# EAGLE board CT_schematic (EAGLE 7.6.0)

Size 100 x 80 mm. Coordinates in mm from the lower left corner, seen from the top.
Outline: 0,0 100,0 100,80 0,80 0,0
Copper layers (1*16): Top 0.035mm / dielectric 1.5mm / Bottom 0.035mm
Design rules "default": minimum track width 10mil, minimum drill 24mil, track to track 8mil, track to pad 8mil, pad to pad 8mil, via to via 8mil, smd to smd 8mil, copper to edge 40mil, drill to drill 8mil, minimum pad ring 10mil, minimum via ring 8mil, stop-mask expansion 4mil, vias tented up to drill 0mil, thermal gap 10mil

## Footprints (pad centres in the part's own frame; a part is rotated, then mirrored left to right if it is on the bottom)
C0603 = smd 0.8 x 0.8: 1 -0.762,0; 2 0.762,0
C0402 = smd 0.5 x 0.5: 1 -0.508,0; 2 0.508,0
C1206 = smd 1.3 x 1.6: 1 -1.524,0; 2 1.524,0
C1210 = smd 1.2 x 2.5: 1 -1.524,0; 2 1.524,0
EXV-9H = smd 3.505 x 1.676: 1 -2.857,0; 2 2.857,0
L0603 = smd 0.8 x 0.8: 1 -0.762,0; 2 0.762,0
PJ-037B_PACKAGE = drill 3.7 square: 1 12,0 | drill 3.2 square: 2 6,0
R0603 = smd 0.8 x 0.8: 1 -0.762,0; 2 0.762,0
LQFP64 = smd 0.3 x 1.2: 1 -3.75,-5.75; 2 -3.25,-5.75; 3 -2.75,-5.75; 4 -2.25,-5.75; 5 -1.75,-5.75; 6 -1.25,-5.75; 7 -0.75,-5.75; 8 -0.25,-5.75; 9 0.25,-5.75; 10 0.75,-5.75; 11 1.25,-5.75; 12 1.75,-5.75; 13 2.25,-5.75; 14 2.75,-5.75; 15 3.25,-5.75; 16 3.75,-5.75; 33 3.75,5.75; 34 3.25,5.75; 35 2.75,5.75; 36 2.25,5.75; 37 1.75,5.75; 38 1.25,5.75; 39 0.75,5.75; 40 0.25,5.75; 41 -0.25,5.75; 42 -0.75,5.75; 43 -1.25,5.75; 44 -1.75,5.75; 45 -2.25,5.75; 46 -2.75,5.75; 47 -3.25,5.75; 48 -3.75,5.75 | smd 1.2 x 0.3: 17 5.75,-3.75; 18 5.75,-3.25; 19 5.75,-2.75; 20 5.75,-2.25; 21 5.75,-1.75; 22 5.75,-1.25; 23 5.75,-0.75; 24 5.75,-0.25; 25 5.75,0.25; 26 5.75,0.75; 27 5.75,1.25; 28 5.75,1.75; 29 5.75,2.25; 30 5.75,2.75; 31 5.75,3.25; 32 5.75,3.75; 49 -5.75,3.75; 50 -5.75,3.25; 51 -5.75,2.75; 52 -5.75,2.25; 53 -5.75,1.75; 54 -5.75,1.25; 55 -5.75,0.75; 56 -5.75,0.25; 57 -5.75,-0.25; 58 -5.75,-0.75; 59 -5.75,-1.25; 60 -5.75,-1.75; 61 -5.75,-2.25; 62 -5.75,-2.75; 63 -5.75,-3.25; 64 -5.75,-3.75
TDFN-8/6MM = smd 0.3 x 0.75: 1 0,0; 2 0.5,0; 3 1,0; 4 1.5,0; 5 1.5,3; 6 1,3; 7 0.5,3; 8 0,3
DFN8-S = smd 0.6 x 0.4: 1 -2.69,1.905; 2 -2.69,0.635; 3 -2.69,-0.635; 4 -2.69,-1.905; 5 2.69,-1.905; 6 2.69,-0.635; 7 2.69,0.635; 8 2.69,1.905
ABLS-25.000MHZ-B2F-T = smd 5.6 x 2.8: 1 -3.81,0; 2 5.69,0
ASEK = smd 1.4 x 1: 1 -1.1,-0.8; 2 1.1,-0.8; 3 1.1,0.8; 4 -1.1,0.8
WSON-8 = smd 0.3 x 0.6: 1 -0.75,0; 2 0.05,0; 3 0.85,0; 4 1.65,0; 5 1.65,3.8; 6 0.85,3.8; 7 0.05,3.8; 8 -0.75,3.8 | smd 3 x 2.6: PAD 0.45,1.9
SON-6 = smd 0.55 x 0.3: 1 -0.355,0.5 | smd 0.52 x 0.3: 2 -0.37,0; 3 -0.37,-0.5; 4 0.37,-0.5; 5 0.37,0; 6 0.37,0.5
SW_4-1437565-2 = smd 1.4 x 2.1: 1 -2.23,4.55; 2 -2.23,-4.55; 3 2.23,4.55; 4 2.23,-4.55
LGM67K-G1J2-24-Z = smd 0.8 x 1.4: A -2,0; C 0,0
NC7SZ125M5X = smd 1.3 x 0.7: 1 -1.3,0.95; 2 -1.3,0; 3 -1.3,-0.95; 4 1.3,-0.95; 5 1.3,0.95

## Placement (x,y rotation side)
C1  1e-07  [C0603]  -48.26,53.34 0 top  (outside the outline)
C2  1e-07  [C0603]  -52.07,53.34 0 top  (outside the outline)
C3  4.7e-06  [C0603]  -44.45,53.34 0 top  (outside the outline)
C4  1e-07  [C0603]  -55.88,53.34 0 top  (outside the outline)
C5  1e-07  [C0603]  -59.69,53.34 0 top  (outside the outline)
C6  1e-08  [C0603]  -15.24,58.42 0 top  (outside the outline)
C7  1e-06  [C0603]  -19.05,58.42 0 top  (outside the outline)
C8  1e-11  [C0402]  -60.96,58.42 0 top  (outside the outline)
C9  1e-11  [C0402]  -15.24,63.5 0 top  (outside the outline)
C10  1e-08  [C0402]  -19.05,63.5 0 top  (outside the outline)
C11  1e-08  [C0402]  -22.86,63.5 0 top  (outside the outline)
C12  1e-08  [C0402]  -26.67,63.5 0 top  (outside the outline)
C13  1e-08  [C0402]  -30.48,63.5 0 top  (outside the outline)
C14  1e-05  [C1206]  -35.56,45.72 0 top  (outside the outline)
C15  1e-05  [C1210]  -29.21,46.99 0 top  (outside the outline)
C16  1e-07  [C0402]  -34.29,63.5 0 top  (outside the outline)
C17  0.0001  [EXV-9H]  -17.78,39.37 0 top  (outside the outline)
C18  0.0001  [EXV-9H]  -29.21,39.37 0 top  (outside the outline)
C19  1e-08  [C0402]  -38.1,63.5 0 top  (outside the outline)
F1  240.0  [L0603]  -22.86,58.42 0 top  (outside the outline)
J1  PJ-037B  [PJ-037B_PACKAGE]  -27.94,7.62 0 top  (outside the outline)
R2  1000.0  [R0603]  -26.67,58.42 0 top  (outside the outline)
R4  4700.0  [R0603]  -30.48,58.42 0 top  (outside the outline)
R5  2200.0  [R0603]  -34.29,58.42 0 top  (outside the outline)
R6  2200.0  [R0603]  -38.1,58.42 0 top  (outside the outline)
R7  2200.0  [R0603]  -41.91,58.42 0 top  (outside the outline)
R8  2200.0  [R0603]  -45.72,58.42 0 top  (outside the outline)
R9  10000.0  [R0603]  -15.24,53.34 0 top  (outside the outline)
R10  10000.0  [R0603]  -20.32,53.34 0 top  (outside the outline)
R11  10000.0  [R0603]  -25.4,53.34 0 top  (outside the outline)
R12  10000.0  [R0603]  -30.48,53.34 0 top  (outside the outline)
R13  100000.0  [R0603]  -46.99,45.72 0 top  (outside the outline)
R14  2231.0  [R0603]  -49.53,58.42 0 top  (outside the outline)
R15  1000.0  [R0603]  -53.34,58.42 0 top  (outside the outline)
R16  10000.0  [R0603]  -35.56,53.34 0 top  (outside the outline)
R17  10000.0  [R0603]  -40.64,53.34 0 top  (outside the outline)
R18  9100.0  [R0603]  -57.15,58.42 0 top  (outside the outline)
R19  680000.0  [R0603]  -52.07,45.72 0 top  (outside the outline)
R20  120000.0  [R0603]  -57.15,45.72 0 top  (outside the outline)
U1  STM32F030RCT6  [LQFP64]  -40.64,7.62 0 top  (outside the outline)
U2  24AA04-I/MC  [TDFN-8/6MM]  -54.61,19.05 0 top  (outside the outline)
U3  24AA512-I/MF  [DFN8-S]  -41.91,20.32 0 top  (outside the outline)
U4  ABLS-25.000MHZ-B2F-T  [ABLS-25.000MHZ-B2F-T]  -48.26,39.37 0 top  (outside the outline)
U5  ASEK-32.768KHz-ECST  [ASEK]  -49.53,30.48 0 top  (outside the outline)
U6  LP3878SDX-ADJ/NOPB  [WSON-8]  -30.48,29.21 0 top  (outside the outline)
U7  TPS3895ADRYR  [SON-6]  -40.64,62.23 0 top  (outside the outline)
U8  4-1437565-2  [SW_4-1437565-2]  -27.94,20.32 0 top  (outside the outline)
U9  Q65110A2395  [LGM67K-G1J2-24-Z]  -17.78,46.99 0 top  (outside the outline)
U10  nc7sz125m5x  [NC7SZ125M5X]  -40.64,45.72 0 top  (outside the outline)

## Library data of the parts
C1-C19 F1 J1 R2 R4-R20 U1-U10 = circuit_tree

## Nets
CLK_CRYSTAL_U1_5: C8.1 U1.5 U4.1
CLK_CRYSTAL_U1_6: C9.1 U1.6 U4.2
CLK_U1_3: U1.3 U5.3
GND: C1.2 C2.2 C3.2 C4.2 C5.2 C6.2 C7.2 C8.2 C9.2 C10.2 C11.2 C12.2 C13.2 C14.2 C15.2 C16.2 C17.2 C18.2 C19.2 J1.2 R2.2 R9.2 R12.2 R15.2 R18.2 R20.2 U1.12 U1.18 U1.31 U1.47 U1.63 U2.4 U3.4 U5.2 U6.3 U6.PAD U7.2 U9.C U10.1 U10.3
NET_U1_7: R4.1 U1.7 U10.4
NET_U1_13: C6.1 C7.1 F1.1 U1.13
NET_U1_29: R7.1 U1.29 U2.6
NET_U1_30: R8.1 U1.30 U2.5
NET_U1_42: R5.1 U1.42 U3.6
NET_U1_43: R6.1 U1.43 U3.5
NET_U1_60: R9.1 U1.60
NET_U1_61: U9.A
NET_U1_62: U8.3 U8.4
NET_U3_1: R10.1 U3.1
NET_U3_2: R11.1 U3.2
NET_U3_3: R12.1 U3.3
NET_U6_1: C13.1 U6.1
NET_U6_6: R14.2 R15.1 U6.6
NET_U6_8: R13.1 U6.8
NET_U7_1: R17.1 R18.1 U7.1
NET_U7_3: R19.2 R20.1 U7.3
NET_U7_4: R16.1 U7.4 U10.2
NET_U8_1: R2.1 U8.1 U8.2
VCC_S1_10V2: C14.1 C17.1 C18.1 J1.1 R13.2 U6.4
VCC_TIER1_3V3: C1.1 C2.1 C3.1 C4.1 C5.1 C10.1 C11.1 C12.1 C15.1 C16.1 C19.1 F1.2 R4.2 R5.2 R6.2 R7.2 R8.2 R10.2 R11.2 R14.1 R16.2 R17.2 R19.1 U1.1 U1.19 U1.32 U1.48 U1.64 U2.7 U2.8 U3.7 U3.8 U5.4 U6.5 U7.6 U10.5

## Tracks (layer width: path | path; a pad name or v marks a point on that pad's centre or on a via)
CLK_CRYSTAL_U1_5  (2 unrouted)
CLK_CRYSTAL_U1_6  (2 unrouted)
CLK_U1_3  (1 unrouted)
GND  (39 unrouted)
NET_U1_7  (2 unrouted)
NET_U1_13  (3 unrouted)
NET_U1_29  (2 unrouted)
NET_U1_30  (2 unrouted)
NET_U1_42  (2 unrouted)
NET_U1_43  (2 unrouted)
NET_U1_60  (1 unrouted)
NET_U1_62  (1 unrouted)
NET_U3_1  (1 unrouted)
NET_U3_2  (1 unrouted)
NET_U3_3  (1 unrouted)
NET_U6_1  (1 unrouted)
NET_U6_6  (2 unrouted)
NET_U6_8  (1 unrouted)
NET_U7_1  (2 unrouted)
NET_U7_3  (2 unrouted)
NET_U7_4  (2 unrouted)
NET_U8_1  (2 unrouted)
VCC_S1_10V2  (5 unrouted)
VCC_TIER1_3V3  (35 unrouted)